# Altium PCB TempSensorDisplay.PcbDoc
Units mil, origin at the board's own origin, x right, y up, seen from the top; angles counter-clockwise.
Board outline 6000 x 4000 mil, 2 copper layers (Top Layer, Bottom Layer); 7 components, 13 nets, 56 pads, 7 vias.
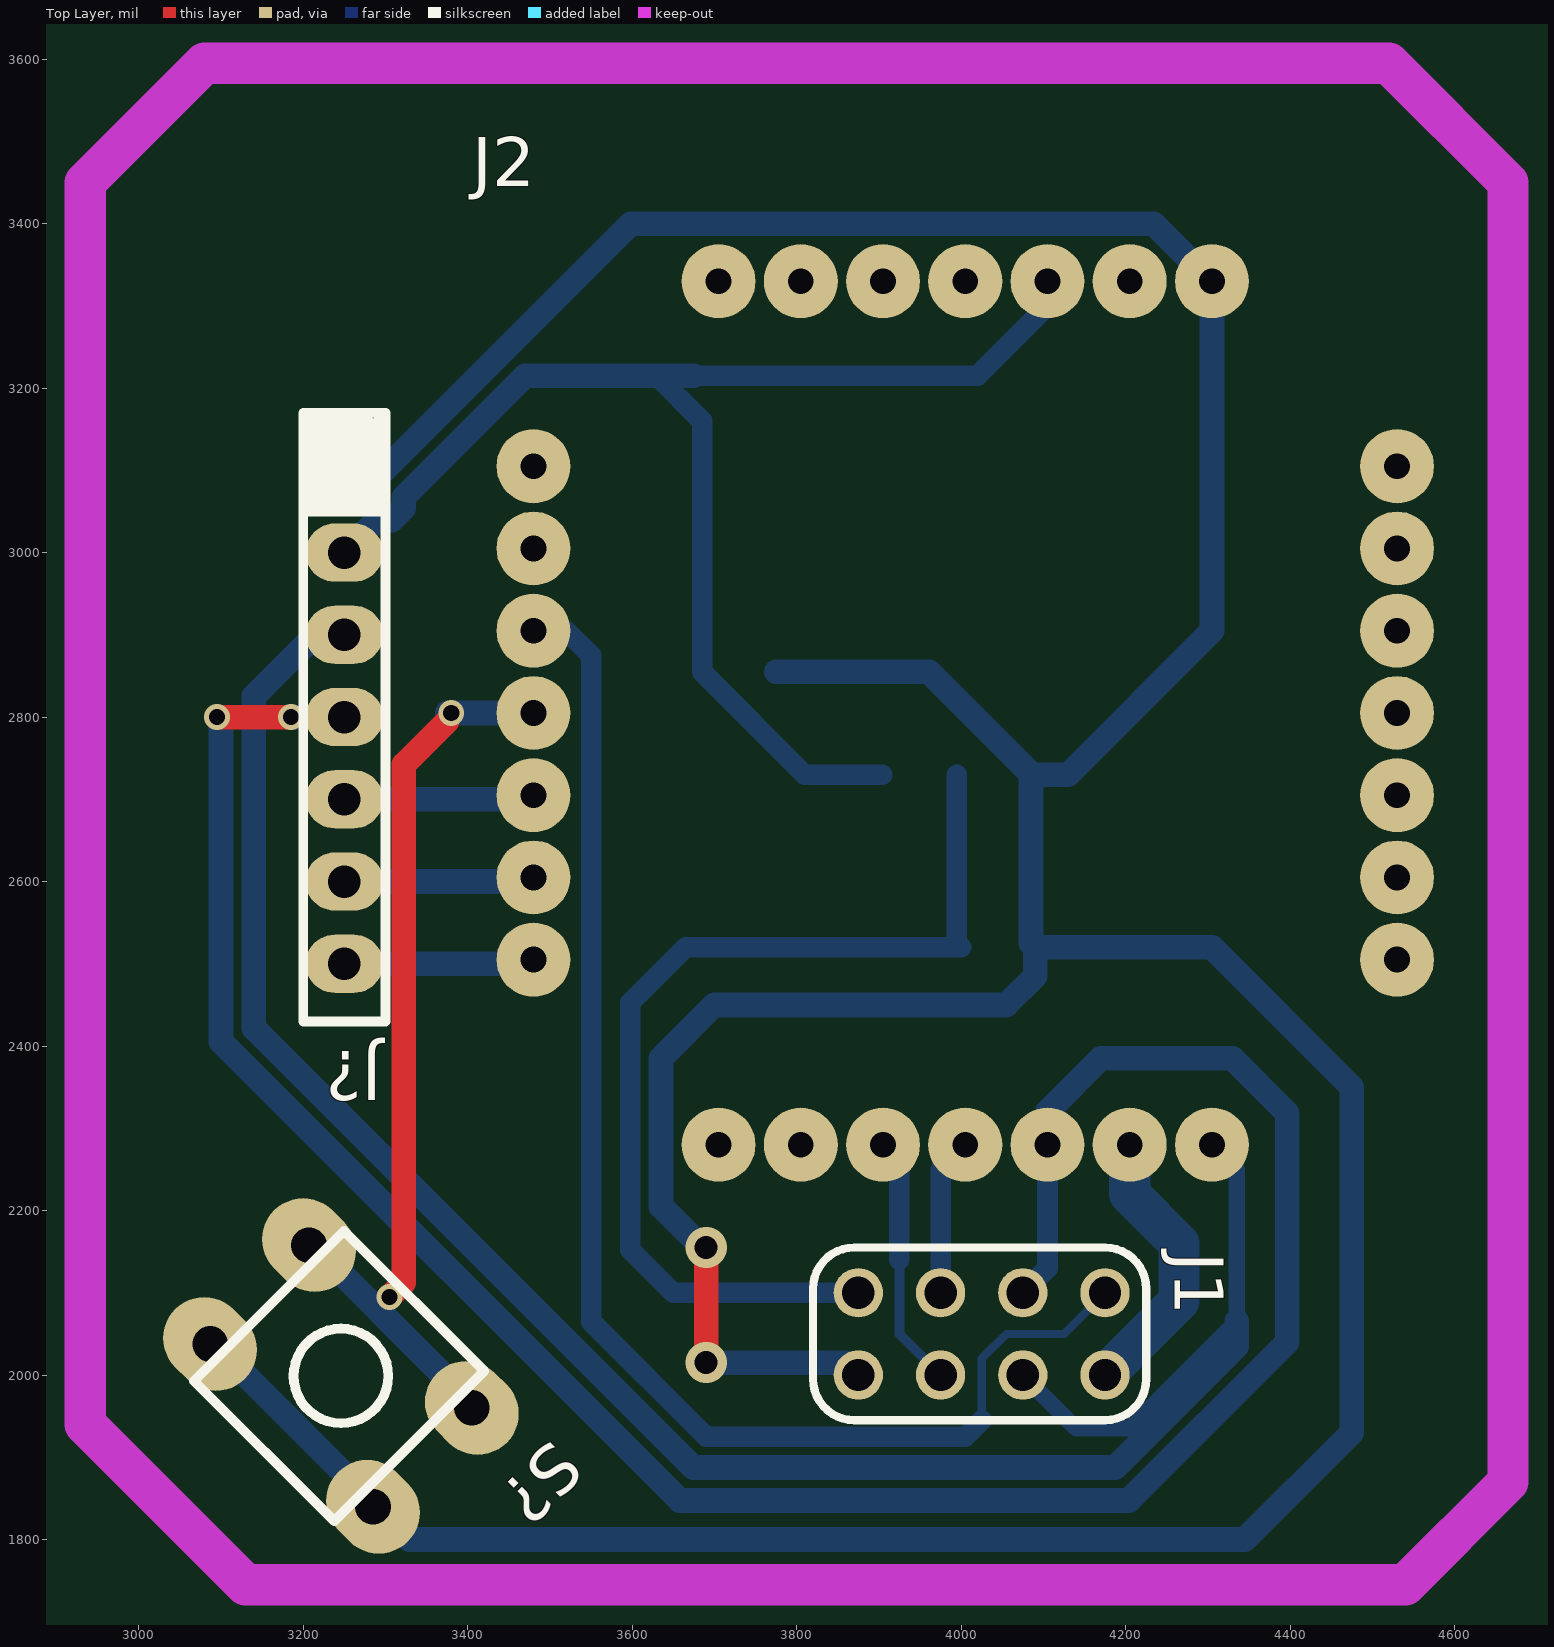
[diagram p0: Top Layer view]
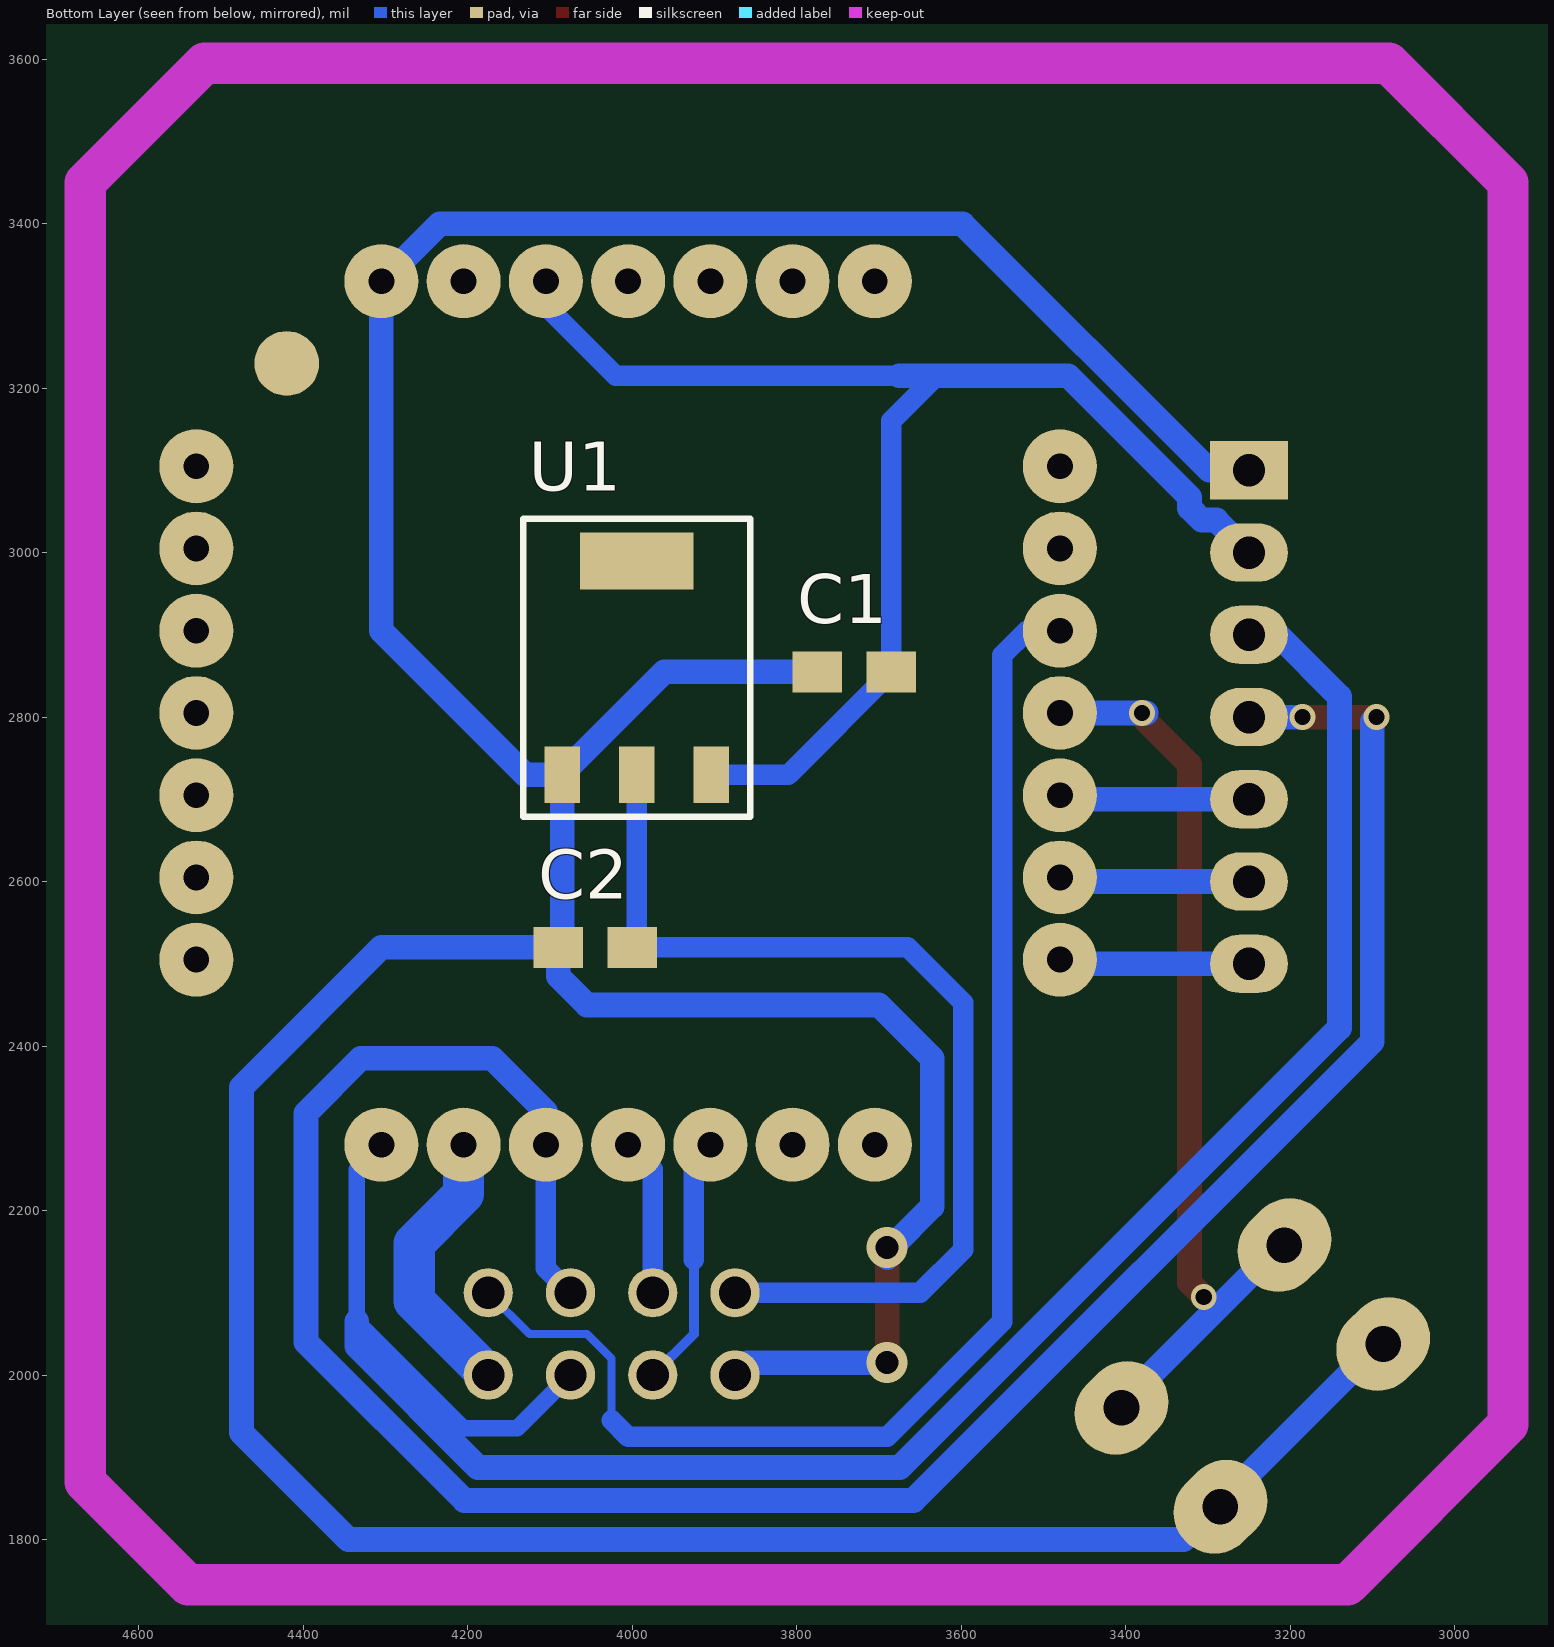
[diagram p1: Bottom Layer view, seen from below]

## Layer stack, top to bottom
Top Layer: signal copper 1.4
Dielectric: dielectric 12.6, FR-4, Dk 4.8
Bottom Layer: signal copper 1.4

## Board outline
1000,1000 7000,1000 7000,5000 1000,5000

## Design rules (kind name [scope] priority, off if disabled: settings)
Clearance [All] p1: gap=10
PolygonConnect [All] p1: connectstyle=Relief reliefconductorwidth=10 reliefentries=4 polygonreliefangle="90 Angle" airgapwidth=10
RoutingVias [All] p1: holewidth=28 width=50 viastyle="Through Hole" minholewidth=28 minwidth=50 maxholewidth=28 maxwidth=50
SolderMaskExpansion [All] p1: expansion=4
Width [All] p1: maxlimit=100 minlimit=10 preferedwidth=30
28 further rules are at their usual default settings.

## Components (designator, comment, footprint, x,y, rotation, side; value= is the part's Value field where it differs from the comment)
C1 "10UF" 0805 3685,2855 r0 bottom
C2 "22UF" 0805 4000,2520 r0 bottom
J1 "Component_1" NRF24L01 3975,2050 r270 top
J2 "MAGI-M8" MAGI-M8 4005,2805 r0 top
J? "OLED12864" SIP7 3250,3100 r270 top
S? "SW-PB" SW-PB 3405,1960 r315 top
U1 "LM1117" SOT-223 4085,2730 r180 bottom

## Footprints (in the part's own frame and the unit in brackets; to place one, negate y for a bottom-side part, rotate by r counter-clockwise, add the part's x,y. Pads: shape width x height; smd on the part's side, far side on the other; paste and mask are expansions set on the pad)
0805 [mil]
  rect 60x50 smd: 1(0,0) 2(90,0)
MAGI-M8 [mil]
  round 90 hole 31.5: 1(300,525) 2(200,525) 3(100,525) 4(0,525) 5(-100,525) 6(-200,525) 7(-300,525) 8(-525,300) 9(-525,200) 10(-525,100) 11(-525,0) 12(-525,-100) 13(-525,-200) 14(-525,-300) 15(-300,-525) 16(-200,-525) 17(-100,-525) 18(0,-525) 19(100,-525) 20(200,-525) 21(300,-525) 22(525,-300) 23(525,-200) 24(525,-100) 25(525,0) 26(525,100) 27(525,200) 28(525,300)
NRF24L01 [mil]
  round 60 hole 39.37: 1(50,-100) 2(-50,-100) 3(50,0) 4(-50,0) 5(50,100) 6(-50,100) 7(50,200) 8(-50,200)
  silkscreen extent -105,-155 105,250
SIP7 [mm]
  rect 1.8x2.4 hole 1: 1(0,0)
  oval 1.8x2.4 hole 1: 2(2.54,0) 3(5.08,0) 4(7.62,0) 5(10.16,0) 6(12.7,0) 7(15.24,0)
  silkscreen extent -1.78,-1.27 17.02,1.27
SOT-223 [mm]
  rect 1.1x1.75 smd: 1(0,0) 2(2.3,0) 3(4.6,0)
  rect 3.5x1.75 smd: 4(2.3,6.6)
  silkscreen extent -1.2,-1.3 5.8,7.9
SW-PB [mil]
  oval 120x100 hole 43.31: 1(-280,0) 1(0,0) 2(-280,-170) 2(0,-170)
  silkscreen extent -262,-216 -21,43

## Part data
C1 C2: library part CAP_1, "Capacitor"

## Free pads (board coordinates)
  round 78.74 smd far side: 0(4420,3230)

## Via types
v1: diameter 31.5, hole 19.68, Top Layer to Bottom Layer, 4 vias
v2: diameter 50, hole 28, Top Layer to Bottom Layer, 3 vias

## Nets (pads, with @x,y where several pads share a name; then routed paths per layer and width w, separated by ;. In a path a pad name is that pad's centre, name@x,y a point inside that pad or via, vN(x,y) a via of type N, cw(c..) or ccw(c..) an arc to the next point about the centre after c; other vN are vias at no path point)
GND: C1.2 C2.2 J1.1 J2.1 J?.1 S?.2 U1.1 | length 6020
  Top Layer w30: v2(3690,2015) v2(3690,2155)
  Bottom Layer w30: S?.2@3092.29,2037.29 3249.79,1879.79 3329.58,1800 4345,1800 4475,1930 4475,2350 4305,2520 C2.2 ; J?.1 3298.43,3100 3598.43,3400 4233.99,3400 4303.99,3330 v2(4305,3330) 4305,2905 4130,2730 U1.1 ; v2(3690,2015) J1.1@3860,2015 ; v2@3690,2142.5 v2(3690,2155) 3685,2155 3635,2205 3635,2385 3700,2450 4055,2450 4090,2485 C2.2 ; C1.2 3960.91,2855 4085,2730.91 U1.1 ; U1.1 4085,2525 C2.2
PB1: J1.3 J2.17 | length 309
  Bottom Layer w12: 3925,2140 3925,2050 J1.3
  Bottom Layer w25: J2.17 3925,2260 3925,2140
PB2: J1.4 J2.18 | length 192.4
  Bottom Layer w25: J1.4 3975,2250 J2.18
PB3: J1.6 J2.19 J?.4 | length 3016
  Top Layer w30: v1(3095,2800) v1(3185,2800)
  Bottom Layer w25: J1.6 4105,2130 J2.19
  Bottom Layer w30: v1(3095,2800) 3100,2795 3100,2405.4 3657.9,1847.5 4204.07,1847.5 4396.57,2040 4396.57,2318.43 4330,2385 4170,2385 4105,2320 J2.19 ; v1(3185,2800) J?.4
PB4: J1.7 J2.20 | length 342.1
  Bottom Layer w50: J1.7 4265,2090 4265,2160 4205,2220 J2.20
PB5: J1.5 J2.21 J?.3 | length 2619.8
  Bottom Layer w20: J1.5 4140,1935 4205,1935 4335,2065 4335,2250 J2.21
  Bottom Layer w30: J?.3 3215,2900 3140,2825 3140,2421.97 3674.47,1887.5 4187.5,1887.5 4335,2035 4335,2065
PD2: J1.8 J2.10 | length 1701.8
  Bottom Layer w10: 4025,1935 4025,1945 4025,2020 4055,2050 4125,2050 J1.8
  Bottom Layer w25: J2.10 3520,2905 3550,2875 3550,2065 3690,1925 4005,1925 4025,1945
PD3: J2.11 S?.1 | length 1049.7
  Top Layer w30: v1(3305,2095) 3322.24,2112.24 3322.24,2742.24 v1@3375,2795
  Bottom Layer w30: S?.1@3217.5,2152.5 S?.1@3370,2000 ; v1@3375,2805 J2.11
  other v1: 3380,2805
PD4: J2.12 J?.5 | length 232.1
  Bottom Layer w30: J?.5 3475,2700 J2.12
PD5: J2.13 J?.6 | length 232.1
  Bottom Layer w30: J?.6 3475,2600 J2.13
PD6: J2.14 J?.7 | length 232.1
  Bottom Layer w30: J?.7 3475,2500 J2.14
VCC: C1.1 J2.3 J?.2 U1.3 | length 1640.4
  Bottom Layer w25: 3630,3215 3685,3160 C1.1 3810,2730 U1.3 ; 3675,3215 4020,3215 J2.3@4105,3300
  Bottom Layer w30: J?.2 3289.57,3039.57 3307.6,3039.57 3322.24,3054.21 3322.24,3067.24 3470,3215 3630,3215 3675,3215
VCC3.3: C2.1 J1.2 U1.2 | length 1242
  Bottom Layer w25: J1.2 3650,2100 3597.5,2152.5 3597.5,2452.5 3665,2520 C2.1 3994.45,2525.55 U1.2
pads on no net: J2.2 J2.4 J2.5 J2.6 J2.7 J2.8 J2.9 J2.15 J2.16 J2.22 J2.23 J2.24 J2.25 J2.26 J2.27 J2.28 U1.4

## Keep-outs
Keep-Out Layer:
  lines w50: 4665,2230 4665,3450 4520,3595 3080,3595 2935,3450 2935,2345 2935,1940 3130,1745 4540,1745 4665,1870 4665,2240